# Altium PCB PCB1.PcbDoc
Units mil, origin at the board's own origin, x right, y up, seen from the top; angles counter-clockwise.
Board outline 8805 x 4000 mil, 4 copper layers (Top Layer, Power Layer, Ground Layer, Bottom Layer), stack 23.756 mil thick; 145 components, 78 nets, 477 pads, 0 vias.
Unrouted connection lines stored in the file: 348.
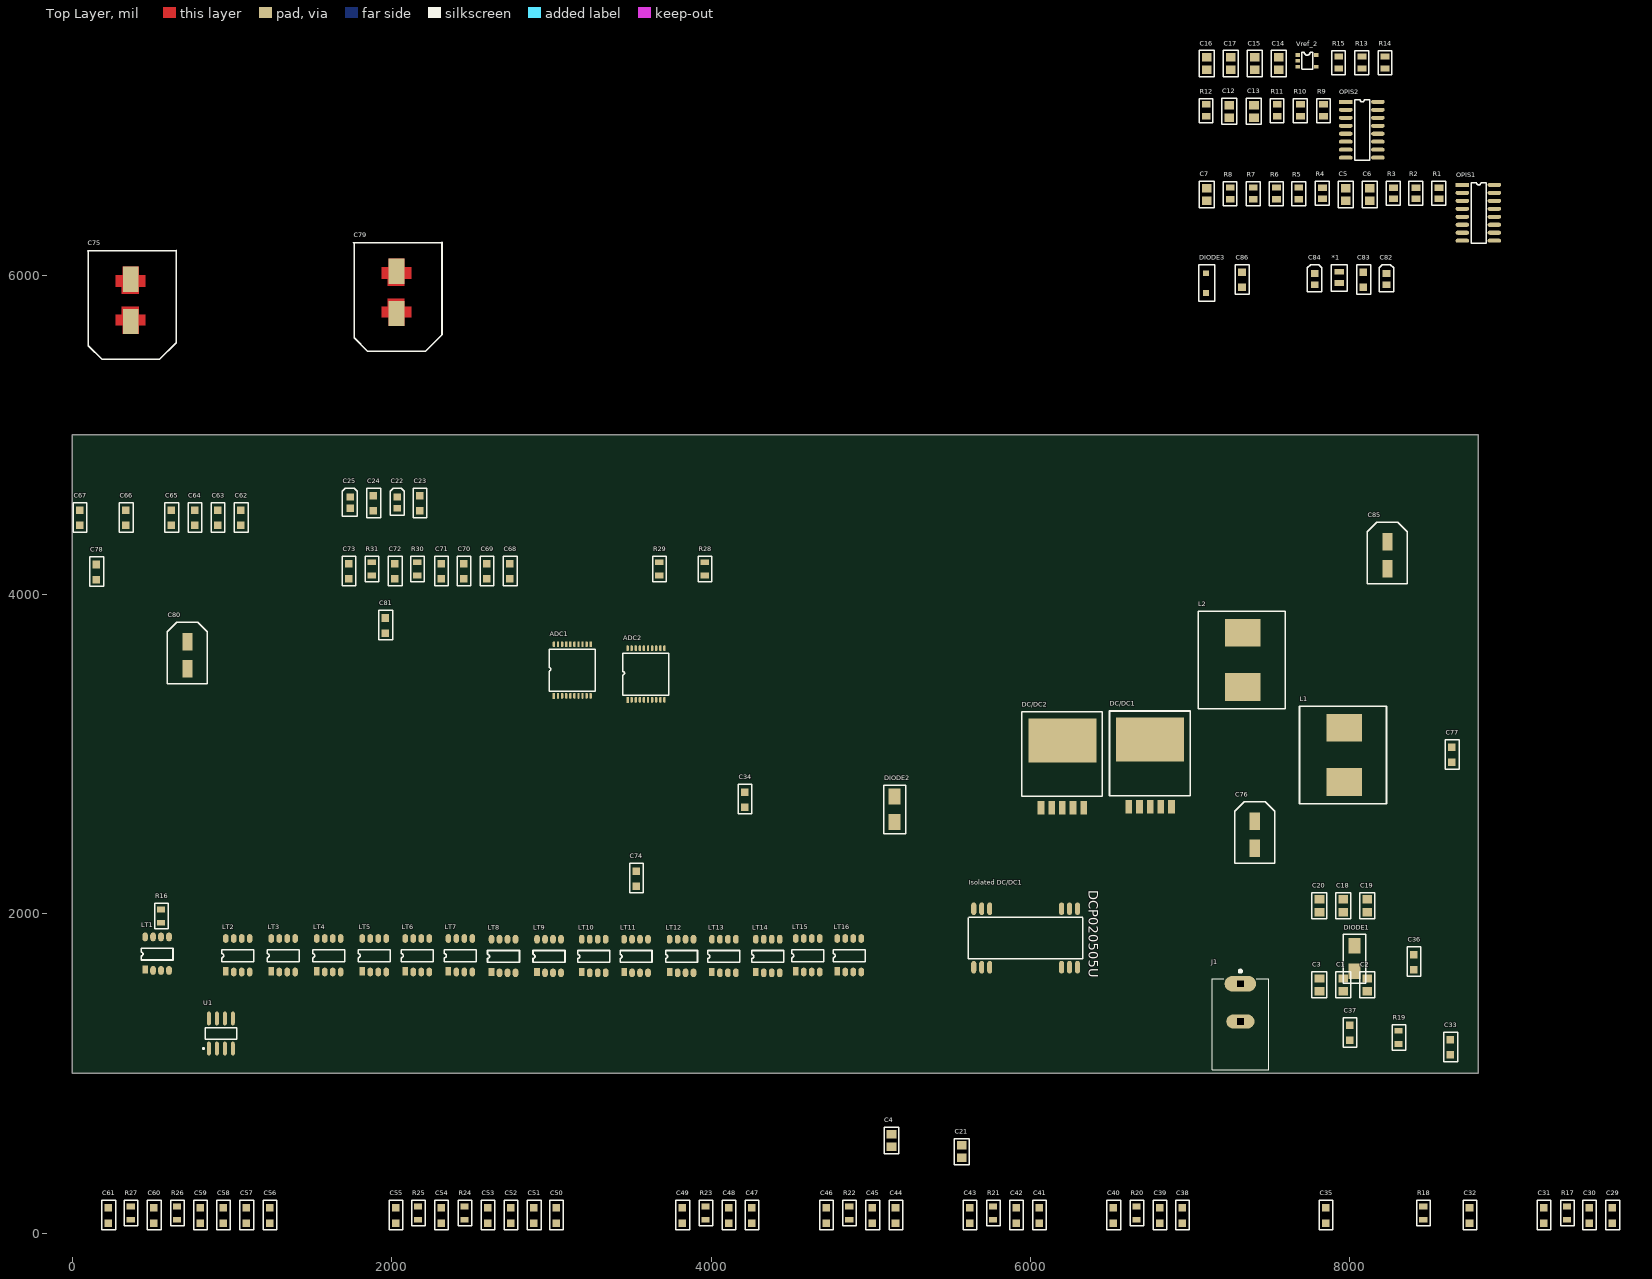
[diagram p0: Top Layer view]
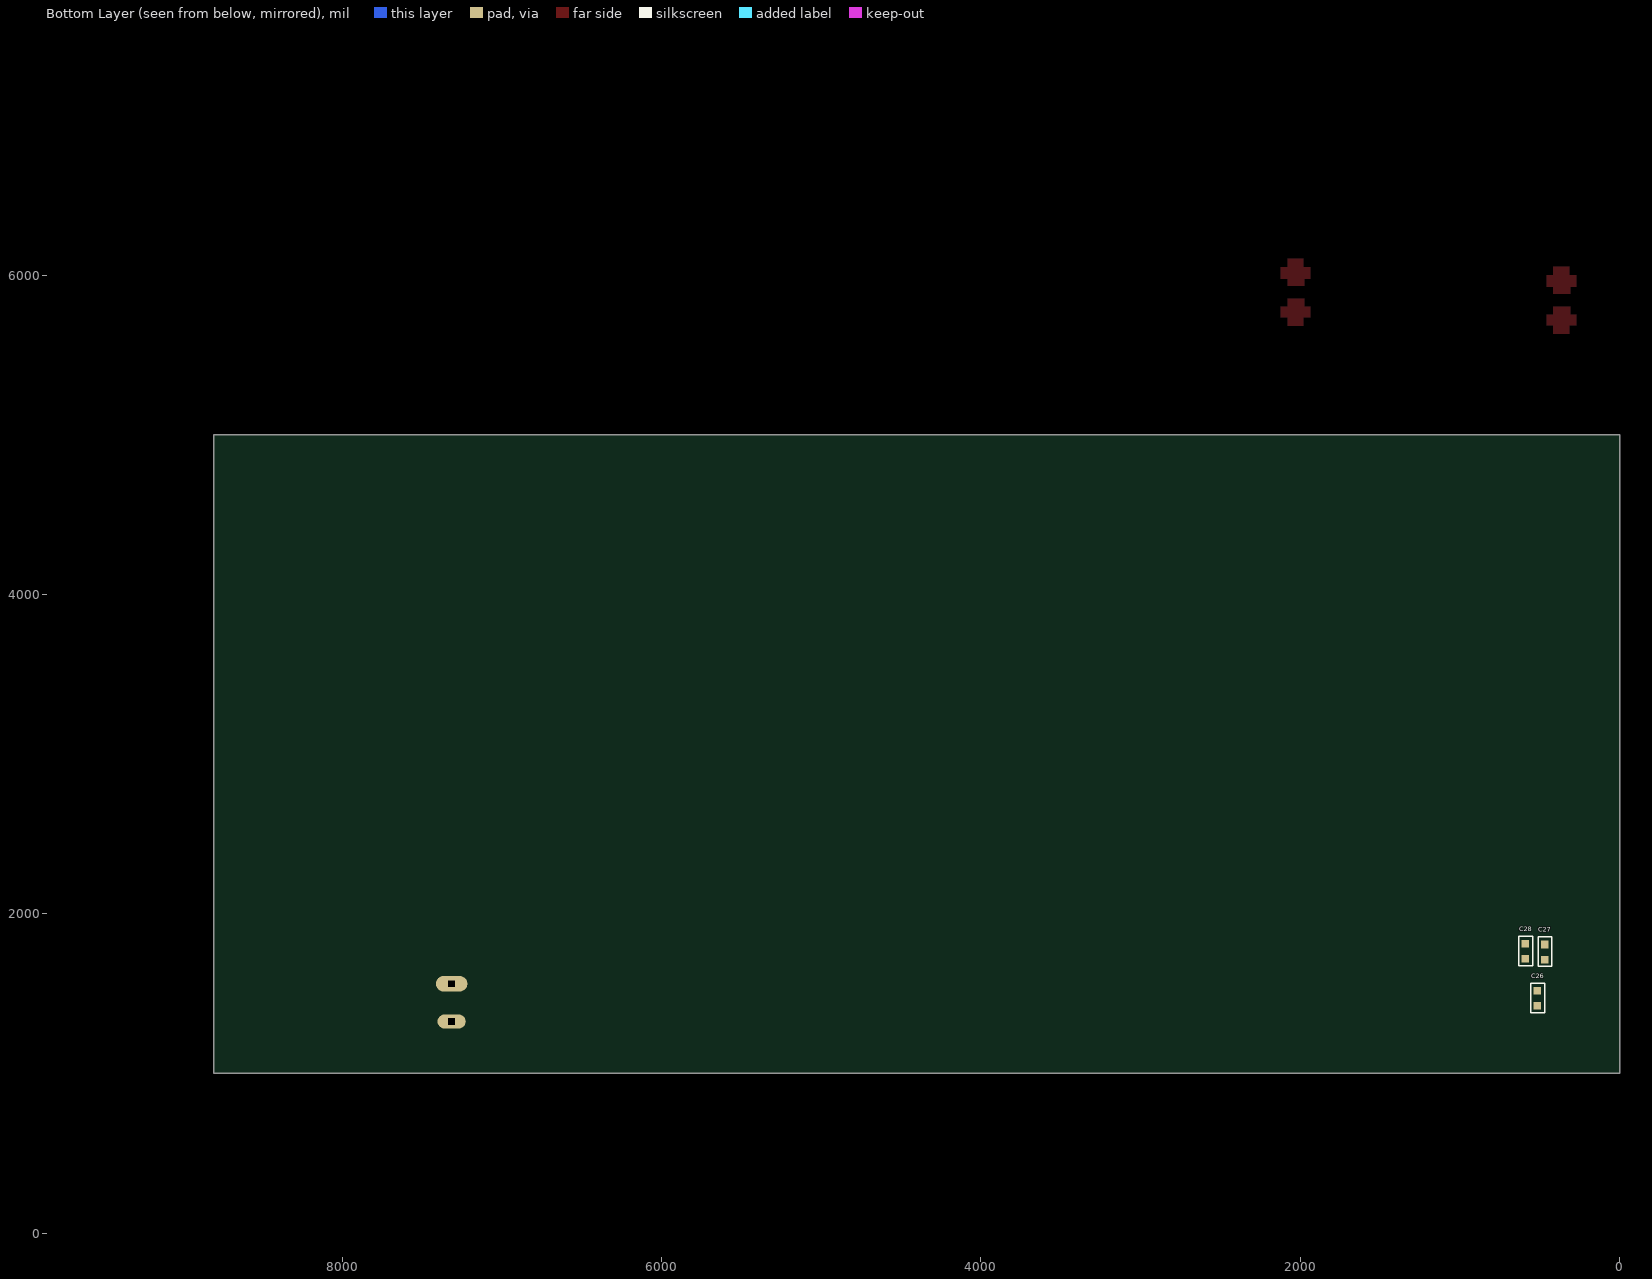
[diagram p1: Bottom Layer view, seen from below]

## Layer stack, top to bottom
Top Solder: solder mask 0.4, Solder Resist, Dk 3.5
Top Layer: signal copper 1.378
Dielectric 3: prepreg 2.8, PP-006, Dk 4.1
Power Layer: signal copper 1.4
Dielectric 1: dielectric 12.6, FR-4, Dk 4.8
Ground Layer: signal copper 1.4
Dielectric 4: prepreg 2.8, PP-006, Dk 4.1
Bottom Layer: signal copper 1.378
Bottom Solder: solder mask 0.4, Solder Resist, Dk 3.5

## Board outline
0,1000 8805,1000 8805,5000 0,5000
board region "Default Layer Stack Region": 5525,5000 8805,5000 8805,1000 5525,1000
board region "Default Layer Stack Region": 5525,1000 0,1000 0,5000 5525,5000

## Design rules (kind name [scope] priority, off if disabled: settings)
Clearance [All] p1: gap=10 ignorepadtopadclearanceinfootprint=FALSE except(0: Arc-Hole Track-Hole SMDPad-Hole THPad-Hole Via-Hole Fill-Hole Poly-Hole Region-Hole Text-Hole)
PolygonConnect [All] p1: connectstyle=Relief reliefconductorwidth=10 reliefentries=4 polygonreliefangle="90 Angle" airgapwidth=10
RoutingVias [All] p1: holewidth=28 width=50 viastyle="Through Hole" minholewidth=28 minwidth=50 maxholewidth=28 maxwidth=50
SolderMaskExpansion [All] p1: expansion=4 istentingtop=FALSE
Width [All] p1: maxlimit=10 minlimit=10 preferedwidth=10
30 further rules are at their usual default settings.

## Classes and differential pairs
component class V_Ref_1: C14 C15 C16 C17 R13 R14 R15 Vref_2
component class Opt_Isolator_2: C12 C13 OPIS2 R9 R10 R11 R12
component class Opt_Isolator_1: C5 C6 C7 OPIS1 R1 R2 R3 R4 R5 R6 R7 R8
component class "ISO DC/DC_1": *1 C82 C83 C84 C85 C86 DIODE3 "Isolated DC/DC1"
component class "Fuel Cell Schematic": J1
component class Designator: C22 C23 C24 C25 U1
component class DC/DC_5_1: C78 C79 C80 C81 DC/DC2 DIODE2 L2
component class DC/DC_3.3_1: C74 C75 C76 C77 DC/DC1 DIODE1 L1
component class ADC1: ADC2 C18 C19 C20 C21

## Components (designator, comment, footprint, x,y, rotation, side; value= is the part's Value field where it differs from the comment)
*1 "5.1ohm resistor" "5.1 ohm resistor" 7935,5985 r90 top
ADC1 "ADS8344N/1K" ADS8344 3015.87,3365 r90 top
ADC2 "ADS8344N/1K" ADS8344 3477.05,3340 r90 top
C1 "Value" Capacitor_Kemet_0805 7960,1555 r90 top
C2 "Value" Capacitor_Kemet_0805 8110,1555 r90 top
C3 "Value" Capacitor_Kemet_0805 7810,1555 r90 top
C4 "Value" Capacitor_Kemet_0805 5130,580 r90 top
C5 "Value" Capacitor_Kemet_0805 7975,6505 r90 top
C6 "Value" Capacitor_Kemet_0805 8125,6505 r90 top
C7 "Value" Capacitor_Kemet_0805 7105,6505 r90 top
C12 "Value" Capacitor_Kemet_0805 7245,7025 r90 top
C13 "Value" Capacitor_Kemet_0805 7400,7025 r90 top
C14 "Value" Capacitor_Kemet_0805 7555,7325 r90 top
C15 "Value" Capacitor_Kemet_0805 7405,7325 r90 top
C16 "Value" Capacitor_Kemet_0805 7105,7325 r90 top
C17 "Value" Capacitor_Kemet_0805 7255,7325 r90 top
C18 "Value" Capacitor_Kemet_0805 7960,2050 r90 top
C19 "Value" Capacitor_Kemet_0805 8110,2050 r90 top
C20 "Value" Capacitor_Kemet_0805 7810,2050 r90 top
C21 "Value" Capacitor_Kemet_0805 5570,510 r90 top
C22 "10 uF (6.3 V)" "10 uF cap" 2035,4575 r90 top
C23 ".1 uF (50 V)" ".1uF capacitor" 2175,4570 r90 top
C24 ".1 uF (50 V)" ".1uF capacitor" 1885,4570 r90 top
C25 "1uf (10V)" "1 uF cap" 1740,4575 r90 top
C26 ".1 uF (50 V)" ".1uF capacitor" 515,1470 r90 bottom
C27 ".1 uF (50 V)" ".1uF capacitor" 470,1760 r90 bottom
C28 ".1 uF (50 V)" ".1uF capacitor" 590,1765 r90 bottom
C29 ".1 uF (50 V)" ".1uF capacitor" 9645,110 r90 top
C30 ".1 uF (50 V)" ".1uF capacitor" 9500,110 r90 top
C31 ".1 uF (50 V)" ".1uF capacitor" 9215,110 r90 top
C32 ".1 uF (50 V)" ".1uF capacitor" 8750,110 r90 top
C33 ".1 uF (50 V)" ".1uF capacitor" 8630,1162.76 r90 top
C34 ".1 uF (50 V)" ".1uF capacitor" 4210,2715 r90 top
C35 ".1 uF (50 V)" ".1uF capacitor" 7850,110 r90 top
C36 ".1 uF (50 V)" ".1uF capacitor" 8400,1697.24 r90 top
C37 ".1 uF (50 V)" ".1uF capacitor" 8000,1255 r90 top
C38 ".1 uF (50 V)" ".1uF capacitor" 6950,110 r90 top
C39 ".1 uF (50 V)" ".1uF capacitor" 6810,110 r90 top
C40 ".1 uF (50 V)" ".1uF capacitor" 6520,110 r90 top
C41 ".1 uF (50 V)" ".1uF capacitor" 6055,110 r90 top
C42 ".1 uF (50 V)" ".1uF capacitor" 5910,110 r90 top
C43 ".1 uF (50 V)" ".1uF capacitor" 5620,110 r90 top
C44 ".1 uF (50 V)" ".1uF capacitor" 5155,110 r90 top
C45 ".1 uF (50 V)" ".1uF capacitor" 5010,110 r90 top
C46 ".1 uF (50 V)" ".1uF capacitor" 4720,110 r90 top
C47 ".1 uF (50 V)" ".1uF capacitor" 4255,110 r90 top
C48 ".1 uF (50 V)" ".1uF capacitor" 4110,110 r90 top
C49 ".1 uF (50 V)" ".1uF capacitor" 3820,110 r90 top
C50 ".1 uF (50 V)" ".1uF capacitor" 3030,110 r90 top
C51 ".1 uF (50 V)" ".1uF capacitor" 2890,110 r90 top
C52 ".1 uF (50 V)" ".1uF capacitor" 2745,110 r90 top
C53 ".1 uF (50 V)" ".1uF capacitor" 2600,110 r90 top
C54 ".1 uF (50 V)" ".1uF capacitor" 2310,110 r90 top
C55 ".1 uF (50 V)" ".1uF capacitor" 2025,110 r90 top
C56 ".1 uF (50 V)" ".1uF capacitor" 1235,110 r90 top
C57 ".1 uF (50 V)" ".1uF capacitor" 1090,110 r90 top
C58 ".1 uF (50 V)" ".1uF capacitor" 945,110 r90 top
C59 ".1 uF (50 V)" ".1uF capacitor" 800,110 r90 top
C60 ".1 uF (50 V)" ".1uF capacitor" 510,110 r90 top
C61 ".1 uF (50 V)" ".1uF capacitor" 225,110 r90 top
C62 ".1 uF (50 V)" ".1uF capacitor" 1055,4480 r90 top
C63 ".1 uF (50 V)" ".1uF capacitor" 910,4480 r90 top
C64 ".1 uF (50 V)" ".1uF capacitor" 765,4480 r90 top
C65 ".1 uF (50 V)" ".1uF capacitor" 620,4480 r90 top
C66 ".1 uF (50 V)" ".1uF capacitor" 335,4480 r90 top
C67 ".1 uF (50 V)" ".1uF capacitor" 45,4480 r90 top
C68 ".1 uF (50 V)" ".1uF capacitor" 2740,4145 r90 top
C69 ".1 uF (50 V)" ".1uF capacitor" 2595,4145 r90 top
C70 ".1 uF (50 V)" ".1uF capacitor" 2450,4145 r90 top
C71 ".1 uF (50 V)" ".1uF capacitor" 2310,4145 r90 top
C72 ".1 uF (50 V)" ".1uF capacitor" 2020,4145 r90 top
C73 ".1 uF (50 V)" ".1uF capacitor" 1730,4145 r90 top
C74 ".1 uF (50 V)" ".1uF capacitor" 3530,2220 r90 top
C75 "330 uF (35 V)" "330uf cap" 365,5841.89 r90 top
C76 "220 uF (6.3 V)" "220 uf cap" 7405,2495 r90 top
C77 ".1 uF (50 V)" ".1uF capacitor" 8640,2995 r90 top
C78 ".1 uF (50 V)" ".1uF capacitor" 150,4140 r90 top
C79 "330 uF (35 V)" "330uf cap" 2030,5891.89 r90 top
C80 "220 uF (6.3 V)" "220 uf cap" 720,3619.65 r90 top
C81 ".1 uF (50 V)" ".1uF capacitor" 1960,3805 r90 top
C82 "10 uF (6.3 V)" "10 uF cap" 8230,5975 r90 top
C83 ".1 uF (50 V)" ".1uF capacitor" 8085,5970 r90 top
C84 "10 uF (6.3 V)" "10 uF cap" 7780,5975 r90 top
C85 "220 uF (6.3 V)" "220 uf cap" 8235,4245.35 r90 top
C86 ".1 uF (50 V)" ".1uF capacitor" 7325,5970 r90 top
DC/DC1 "Value" LM2595s-3.3 6750,2669.92 r90 top
DC/DC2 "LM2595s-5.0" LM2595s-5.0 6200,2664.92 r90 top
DIODE1 "B340AE-13" B340AE-13 8030,1720 r90 top
DIODE2 "B340AE-13" B340AE-13 5150,2655 r90 top
DIODE3 "Value" "MMSZ5231B-7-F Zener diode" 7100,5950 r90 top
"Isolated DC/DC1" "DCP020505U/1K" "DCP020505U - duplicate" 6295,2031.14 r270 top
J1 "PJ-037A" CUI_PJ-037A 7315,1561.22 r270 top
L1 "100 uH" "100uH inductor" 7965,2825 r90 top
L2 "100 uH" "100uH inductor" 7330,3420 r90 top
LT1 "LT1990" LT1990ACS8 455,1650 r90 top
LT2 "LT1990" LT1990ACS8 960,1640 r90 top
LT3 "LT1990" LT1990ACS8 1245,1640 r90 top
LT4 "LT1990" LT1990ACS8 1530,1640 r90 top
LT5 "LT1990" LT1990ACS8 1815,1640 r90 top
LT6 "LT1990" LT1990ACS8 2085,1640 r90 top
LT7 "LT1990" LT1990ACS8 2355,1640 r90 top
LT8 "LT1990" LT1990ACS8 2625,1635 r90 top
LT9 "LT1990" LT1990ACS8 2910,1635 r90 top
LT10 "LT1990" LT1990ACS8 3190,1635 r90 top
LT11 "LT1990" LT1990ACS8 3455,1635 r90 top
LT12 "LT1990" LT1990ACS8 3740,1635 r90 top
LT13 "LT1990" LT1990ACS8 4005,1635 r90 top
LT14 "LT1990" LT1990ACS8 4280,1635 r90 top
LT15 "LT1990" LT1990ACS8 4530,1640 r90 top
LT16 "LT1990" LT1990ACS8 4790,1640 r90 top
OPIS1 "Value" Opto_Isolator_ACSL6400_50TE 8705,6565 r0 top
OPIS2 "Value" Opto_Isolator_ACSL6400_50TE 7975,7085 r0 top
R1 "Value" LowR_Yageo 8555,6535 r90 top
R2 "Value" LowR_Yageo 8410,6535 r90 top
R3 "Value" LowR_Yageo 8270,6535 r90 top
R4 "Value" LowR_Yageo 7825,6535 r90 top
R5 "Value" Resistor_YAGEO_0805 7680,6510 r90 top
R6 "Value" Resistor_YAGEO_0805 7540,6510 r90 top
R7 "Value" Resistor_YAGEO_0805 7395,6510 r90 top
R8 "Value" Resistor_YAGEO_0805 7250,6510 r90 top
R9 "Value" Resistor_YAGEO_0805 7835,7030 r90 top
R10 "Value" Resistor_YAGEO_0805 7690,7030 r90 top
R11 "Value" Resistor_YAGEO_0805 7545,7030 r90 top
R12 "Value" Resistor_YAGEO_0805 7100,7030 r90 top
R13 "Value" Resistor_YAGEO_0805 8075,7330 r90 top
R14 "Value" Resistor_YAGEO_0805 8220,7330 r90 top
R15 "Value" Resistor_YAGEO_0805 7930,7330 r90 top
R16 "1kohm resistor" "1kohm resistor" 555,1985 r90 top
R17 "1kohm resistor" "1kohm resistor" 9360,125 r90 top
R18 "1kohm resistor" "1kohm resistor" 8460,125 r90 top
R19 "1kohm resistor" "1kohm resistor" 8305,1225 r90 top
R20 "1kohm resistor" "1kohm resistor" 6665,125 r90 top
R21 "1kohm resistor" "1kohm resistor" 5765,125 r90 top
R22 "1kohm resistor" "1kohm resistor" 4865,125 r90 top
R23 "1kohm resistor" "1kohm resistor" 3965,125 r90 top
R24 "1kohm resistor" "1kohm resistor" 2455,125 r90 top
R25 "1kohm resistor" "1kohm resistor" 2165,125 r90 top
R26 "1kohm resistor" "1kohm resistor" 655,125 r90 top
R27 "1kohm resistor" "1kohm resistor" 365,125 r90 top
R28 "1kohm resistor" "1kohm resistor" 3960,4160 r90 top
R29 "1kohm resistor" "1kohm resistor" 3675,4160 r90 top
R30 "1kohm resistor" "1kohm resistor" 2160,4160 r90 top
R31 "1kohm resistor" "1kohm resistor" 1875,4160 r90 top
U1 "REF191GSZ-REEL" ADI-R-8_N 930,1250 r90 top
Vref_2 "Value" VRef 7680,7380 r0 top

## Footprints (in the part's own frame and the unit in brackets; to place one, negate y for a bottom-side part, rotate by r counter-clockwise, add the part's x,y. Pads: shape width x height; smd on the part's side, far side on the other; paste and mask are expansions set on the pad)
"1 uF cap" [mm]
  rect 1.15x1.2 smd: 1(0.889,0) 2(-0.889,0)
  silkscreen extent -2.16,-1.14 2.29,1.27, body extent -1.12,-0.72 1.12,0.72, height 1.24
"1kohm resistor" [mm]
  rect 0.9x1.3 smd: 1(-1.05,0) 2(1.05,0)
  silkscreen extent -2.03,-1.14 2.03,1.02, body extent -1.1,-0.67 1.1,0.67, height 0.66
"5.1 ohm resistor" [mm]
  rect 0.9x1.5 smd: 1(-0.889,0) 2(0.889,0)
  silkscreen extent -2.16,-1.27 2.03,1.27, body extent -1.1,-0.67 1.1,0.67, height 0.66
"10 uF cap" [mm]
  rect 1.05x1.2 smd: 1(0.889,0) 2(-0.889,0)
  silkscreen extent -2.03,-1.14 2.29,1.14, body extent -1.12,-0.72 1.12,0.72, height 1.24
"100uH inductor" [mm]
  rect 4.4x5.7 smd: 1(0,0) 2(8.636,0)
  silkscreen extent -3.43,-6.73 12.06,7.11, body extent -1.83,-6.27 10.47,6.02, height 8.05
"220 uf cap" [mm]
  rect 2.8x1.6 smd: 1(2.15,0) 2(-2.15,0)
  silkscreen extent -4.57,-3.18 5.25,3.18, body extent -3.25,-2.76 3.25,2.76, height 6.15
"330uf cap" [mil]
  rect 157x98 smd paste+0 mask+0: 1(-131.89,0) 2(131.89,0)
  Top Layer region: -157.39,49 -210.39,49 -210.39,-49 -157.39,-49 -157.39,-92 -90,-92 -90,-49 -40,-49 -40,55 -90,55 -90,92 -157.39,92
  Top Layer region: 85,55 40,55 40,-49 85,-49 85,-92 157.39,-92 157.39,-49 210.39,-49 210.39,49 157.39,49 157.39,92 85,92
  silkscreen extent -370,-285 312,270, body extent -191,-158 191,168, height 414
".1uF capacitor" [mm]
  rect 1.2x1.2 smd: 1(-1.2,0) 2(1.2,0)
  silkscreen extent -2.29,-1.14 2.41,1.03, body extent -1,-0.63 1,0.63, height 1.35
ADI-R-8_N [mm] "SOIC, 8-Leads, Body 4.9x3.9mm, Pitch 1.27mm, IPC Medium Density"
  oval 2.2x0.6 smd: 1(-2.4,1.905) 2(-2.4,0.635) 3(-2.4,-0.635) 4(-2.4,-1.905) 5(2.4,-1.905) 6(2.4,-0.635) 7(2.4,0.635) 8(2.4,1.905)
  silkscreen extent -2.52,-2.5 0.9,2.88, body extent -3.1,-2.5 3.1,2.5, height 1.76
ADS8344 [mm]
  rect 0.95x0.38 smd: 1(0,0)
  oval 0.95x0.38 smd: 2(0,-0.65) 3(0,-1.3) 4(0,-1.95) 5(0,-2.6) 6(0,-3.25) 7(0,-3.9) 8(0,-4.55) 9(0,-5.2) 10(0,-5.85) 11(8.2,-5.85) 12(8.2,-5.2) 13(8.2,-4.55) 14(8.2,-3.9) 15(8.2,-3.25) 16(8.2,-2.6) 17(8.2,-1.95) 18(8.2,-1.3) 19(8.2,-0.65) 20(8.2,0)
  silkscreen extent 0.75,-6.55 7.42,0.77, body extent -0.03,-6.67 8.18,0.82, height 2.01
B340AE-13 [mm]
  rect 2.5x1.9 smd: A(-2.032,0) K(2,0)
  silkscreen extent -3.94,-1.78 3.81,1.78, body extent -2.79,-1.46 2.79,1.46, height 2.44
Capacitor_Kemet_0805 [mm]
  rect 1.35x1.55 smd: 1(-1,0) 2(1,0)
  silkscreen extent -2.08,-1.17 2.08,1.19, body extent -1.15,-0.72 1.15,0.72, height 1.4
CUI_PJ-037A [mm]
  oval 2.5x5 hole 1 square: 1(0,0)
  oval 2.25x4.5 hole 1 square: 2(6,0)
  silkscreen extent -2.2,-4.5 13.7,4.5, body extent -0.91,-4.63 13.59,4.37, height 10.51
"DCP020505U - duplicate" [mm]
  oval 2x0.8 smd: 1(0,0) 2(0,-1.27) 3(0,-2.54) 4(0,-13.97) 5(0,-15.24) 6(0,-16.51) 7(9.3,0) 8(9.3,-1.27) 9(9.3,-2.54) 10(9.3,-13.97) 11(9.3,-15.24) 12(9.3,-16.51)
  silkscreen extent 1.33,-17.35 7.97,0.82, body extent -0.63,-17.3 10.02,0.79, height 1.7
LM2595s-3.3 [mm]
  rect 2.16x1.07 smd: 1(0,3.4) 2(0,1.7) 3(0,0) 4(0,-1.7) 5(0,-3.4)
  rect 7x10.8 smd: 6(10.67,0)
  silkscreen extent 1.78,-6.35 15.24,6.48, body extent 0,-5.21 12.13,5.21, height 4.8
LM2595s-5.0 [mm]
  rect 2.16x1.07 smd: 1(0,3.4) 2(0,1.7) 3(0,0) 4(0,-1.7) 5(0,-3.4)
  rect 7x10.8 smd: 6(10.67,0)
  silkscreen extent 1.78,-6.35 15.24,6.48, body extent 0,-5.21 12.13,5.21, height 4.8
LowR_Yageo [mm]
  rect 1x1.4 smd: 1(-1.45,-0.1) 2(0.3,-0.1)
  silkscreen extent -2.51,-1.17 1.3,1.02, body extent -1.58,-0.72 0.43,0.48, height 0.71
LT1990ACS8 [mil]
  rect 51.18x35 smd: 1(0,0)
  oval 55.12x35 smd: 2(-5,-50) 3(-5,-100) 4(-5,-150) 5(205,-150) 6(205,-100) 7(205,-50) 8(205,0)
  silkscreen extent 60,-175 135,25, body extent -20,-174 224,24, height 69
"MMSZ5231B-7-F Zener diode" [mm]
  rect 0.9x0.95 smd: A(-1.575,0) K(1.575,0)
  silkscreen extent -2.92,-1.4 2.92,1.13, body extent -1.92,-0.67 1.92,0.67, height 0.81
Opto_Isolator_ACSL6400_50TE [mm]
  rect 2.16x0.64 smd: 1(0,0)
  oval 2.16x0.64 smd: 2(0,-1.27) 3(0,-2.54) 4(0,-3.81) 5(0,-5.08) 6(0,-6.35) 7(0,-7.62) 8(0,-8.89) 9(5.11,-8.89) 10(5.11,-7.62) 11(5.11,-6.35) 12(5.11,-5.08) 13(5.11,-3.81) 14(5.11,-2.54) 15(5.11,-1.27) 16(5.11,0)
  silkscreen extent 1.42,-9.33 3.8,0.31, body extent -0.52,-9.45 5.67,0.55, height 1.53
Resistor_YAGEO_0805 [mil]
  rect 39.37x55.12 smd: 1(-36,-1) 2(39,-1)
  silkscreen extent -75,-43 75,43, body extent -40,-27 43,26, height 24
VRef [mil]
  rect 27.56x23.62 smd: 1(-5,-1) 2(-5,-38) 3(-5,-76) 4(110,-76) 5(110,-1)
  silkscreen extent 18,-92 87,16, body extent -6,-97 112,21, height 57

## Part data
ADC1 ADC2: "IC ADC 16BIT SAR 20SSOP", Case/Package=SSOP, Manufacturer="Texas Instruments", Max Operating Temperature=85°C, Max Power Dissipation=10mW, Max Supply Voltage=5.25V, Min Operating Temperature=-40°C, Min Supply Voltage=2.7V, Nominal Supply Current=1.5mA, Operating Supply Voltage=5V, Package Quantity=1000, Power Consumption=3.6mW, Power Dissipation=7.5mW, Supplier Part Number 1=296-41197-1-ND, Category="Analog to Digital Converters (ADCs)", ComponentLink1Description=https://datasheet.ciiva.com/4031/2422049s9164356n7713-4031078.pdf?src-supplier=Arrow+Electronics, ComponentLink1URL=https://datasheet.ciiva.com/4031/2422049s9164356n7713-4031078.pdf?src-supplier=Arrow+Electronics, ComponentLink2Description=https://datasheet.ciiva.com/1308/ads8344-1308384.pdf?src-supplier=Digi-Key, ComponentLink2URL=https://datasheet.ciiva.com/1308/ads8344-1308384.pdf?src-supplier=Digi-Key, Contact Plating=Gold, Conversion Rate=100KS/s, Differential Nonlinearity=2LSB, Integral Nonlinearity (INL)=6LSB, Interface=Serial, Lead Free="Lead Free", Manufacturer Part Number=ADS8344N/1K, Max Supply Voltage (DC)=5.25V, Min Supply Voltage (DC)=2.7V, Number of A/D Converters=1, Number of Bits=16, Number of Converters=1, Number of Inputs=8, Number of Pins=20, Packaging="Tape and Reel", Polarity=Unipolar, Pricing 1="1=18.10000, 10=16.63400, 25=15.94480, 100=14.04870, 250=13.35924, 500=13.00960 (USD)", REACH SVHC="No SVHC", Resolution=16b, RoHS=Yes, RoHS Compliant=Yes, Sampling Rate=100KS/s, Series=-, Spurious-free dynamic range (SFDR)=92dB, Stock 1=1147, Supplier 1=Digi-Key, Supply Current=1.5mA, Supply Type=Single
C1 C2 C7 C16 C17 C18 C19: library part C0805C475J4RACAUTO, "CAP CER 4.7UF 16V X7R 0805", Capacitance=4.7uF, Case/Package=0805, Manufacturer=KEMET, Max Operating Temperature=125°C, Min Operating Temperature=-55°C, Ratings=AEC-Q200, Supplier Part Number 1=399-15716-1-ND, Tolerance=5%, Voltage Rating=16V, Category="Ceramic Capacitors", ComponentLink1Description=http://www.farnell.com/datasheets/2741387.pdf?src-supplier=Farnell, ComponentLink1URL=http://www.farnell.com/datasheets/2741387.pdf?src-supplier=Farnell, ComponentLink2Description=https://api.kemet.com/component-edge/download/datasheet/C0805C475J4RACAUTO.pdf?src-supplier=Digi-Key, ComponentLink2URL=https://api.kemet.com/component-edge/download/datasheet/C0805C475J4RACAUTO.pdf?src-supplier=Digi-Key, ComponentLink3Description=http://www.farnell.com/datasheets/2741387.pdf?src-supplier=Newark, ComponentLink3URL=http://www.farnell.com/datasheets/2741387.pdf?src-supplier=Newark, Manufacturer Part Number=C0805C475J4RACAUTO, Mount="Surface Mount", Packaging="Tape and Reel", Pricing 1="1=0.56000, 10=0.39300, 50=0.29680, 100=0.25850, 500=0.19150, 1000=0.16277 (USD)", RoHS=Yes, RoHS Compliant=Yes, Stock 1=16673, Supplier 1=Digi-Key
C3 C4 C14 C15 C20 C21: library part C0805C104J4RACTU, "Cap Ceramic 0.1uF 16V X7R 5% SMD 0805 125°C Plastic T/R", Capacitance=100nF, Case Code (Imperial)=0805, Case Code (Metric)=2012, Dielectric=X7R, Dielectric Material=Ceramic, Manufacturer=KEMET, Max Operating Temperature=125°C, Min Operating Temperature=-55°C, Package Quantity=4000, Supplier Part Number 1=399-C0805C104J4RAC7800CT-ND, Voltage Rating=16V, Case/Package=0805, Category="Ceramic Capacitors", ComponentLink1Description=http://www.farnell.com/datasheets/2746326.pdf?src-supplier=Farnell, ComponentLink1URL=http://www.farnell.com/datasheets/2746326.pdf?src-supplier=Farnell, ComponentLink2Description=http://www.farnell.com/datasheets/2323359.pdf?src-supplier=Farnell, ComponentLink2URL=http://www.farnell.com/datasheets/2323359.pdf?src-supplier=Farnell, ComponentLink3Description=http://www.mouser.com/ds/2/212/KEM_C1002_X7R_SMD-1102033.pdf?src-supplier=Mouser, ComponentLink3URL=http://www.mouser.com/ds/2/212/KEM_C1002_X7R_SMD-1102033.pdf?src-supplier=Mouser, ComponentLink4Description=http://components.arrow.com/part/dataview/3452184S4481915N7429?src-supplier=Arrow+Electronics, ComponentLink4URL=http://components.arrow.com/part/dataview/3452184S4481915N7429?src-supplier=Arrow+Electronics, ComponentLink5Description=https://api.kemet.com/component-edge/download/datasheet/C0805C104J4RACTU.pdf?src-supplier=Digi-Key, ComponentLink5URL=https://api.kemet.com/component-edge/download/datasheet/C0805C104J4RACTU.pdf?src-supplier=Digi-Key, ComponentLink6Description=http://www.farnell.com/datasheets/2330568.pdf?src-supplier=Newark, ComponentLink6URL=http://www.farnell.com/datasheets/2330568.pdf?src-supplier=Newark, ComponentLink7Description=http://www.farnell.com/datasheets/2746326.pdf?src-supplier=Newark, ComponentLink7URL=http://www.farnell.com/datasheets/2746326.pdf?src-supplier=Newark, Depth=1.25mm, Dissipation Factor=5%, Height=0.9mm, Lead Pitch=0.75mm, Length=2mm, Manufacturer Part Number=C0805C104J4RACTU, Mount="Surface Mount", Packaging="Tape and Reel", Pricing 1="1=0.53000, 10=0.37300, 50=0.28180, 100=0.24540, 500=0.18180, 1000=0.15453 (USD)", RoHS=Yes, RoHS Compliant=Yes, Series=-, Stock 1=21669, Supplier 1=Digi-Key, Termination=SMD/SMT, Thickness=0.035inch, Voltage Rating (DC)=16V, Width=1.2mm
C5 C6 C12 C13: library part C0805C104K6RACTU, "Cap Ceramic 0.1uF 35V X7R 10% SMD 0805 125°C Paper T/R", Capacitance=100nF, Case/Package=0805, Dielectric=X7R, Dielectric Material=Ceramic, Manufacturer=KEMET, Max Operating Temperature=125°C, Min Operating Temperature=-55°C, Supplier Part Number 1=399-17618-1-ND, Tolerance=10%, Voltage Rating (DC)=35V, Category="Ceramic Capacitors", ComponentLink1Description=http://www.kemet.com/kemet/web/homepage/kechome.nsf/weben/C4DA2DA1D1C9D3C3CA2570A50016092D/$file/KEM_C1002_X7R_SMD.pdf?src-supplier=Avnet, ComponentLink1URL=http://www.kemet.com/kemet/web/homepage/kechome.nsf/weben/C4DA2DA1D1C9D3C3CA2570A50016092D/$file/KEM_C1002_X7R_SMD.pdf?src-supplier=Avnet, ComponentLink2Description=https://api.kemet.com/component-edge/download/datasheet/C0805C104K6RAC7800.pdf?src-supplier=Digi-Key, ComponentLink2URL=https://api.kemet.com/component-edge/download/datasheet/C0805C104K6RAC7800.pdf?src-supplier=Digi-Key, Construction=Flat, Depth=1.25mm, Height=0.9mm, Length=2mm, Manufacturer Part Number=C0805C104K6RACTU, Mount="Surface Mount", Packaging="Tape and Reel", Pricing 1="1=0.44000, 10=0.30300, 50=0.21200, 100=0.18180, 500=0.13636, 1000=0.11514 (USD)", Radiation Hardening=No, RoHS=Yes, RoHS Compliant=Yes, Stock 1=14662, Supplier 1=Digi-Key
C22 C82 C84: library part "10 uF cap"
C23 C24 C26 C27 C28 C29 C30 C31 C32 C33 C34 C35 C36 C37 C38 C39 C40 C41 C42 C43 C44 C45 C46 C47 C48 C49 C50 C51 C52 C53 C54 C55 C56 C57 C58 C59 C60 C61 C62 C63 C64 C65 C66 C67 C68 C69 C70 C71 C72 C73 C74 C77 C78 C81 C83 C86: library part ".1 uF cap"
C25: library part "1uf cap"
C75 C79: library part "330 uF cap"
C76 C80 C85: library part "220 uF capacitor"
DC/DC1: library part LM2595SX-3.3/NOPB, "SIMPLE SWITCHE Power Converter 150 KHz 1A Step-Down Voltage egulator 5-DDPAK/TO-263", Case/Package=TO-263, Frequency=150kHz, Manufacturer="Texas Instruments", Manufacturer Part Number=LM2595S-5.0/NOPB, Max Input Voltage=40V, Max Operating Temperature=125°C, Max Output Current=1A, Max Output Voltage=5V, Min Input Voltage=4.5V, Min Operating Temperature=-40°C, Package Quantity=45, Quiescent Current=5mA, Switching Frequency=173kHz, Category="Voltage Regulators - Switching", ComponentLink1Description=https://datasheet.ciiva.com/14150/eanatsemico-schaltr-lm2595-en-14150687.pdf?src-supplier=Distrelec, ComponentLink1URL=https://datasheet.ciiva.com/14150/eanatsemico-schaltr-lm2595-en-14150687.pdf?src-supplier=Distrelec, ComponentLink2Description=https://datasheet.ciiva.com/15112/getdatasheetpartid-89913-15112836.pdf?src-supplier=Verical, ComponentLink2URL=https://datasheet.ciiva.com/15112/getdatasheetpartid-89913-15112836.pdf?src-supplier=Verical, ComponentLink3Description=https://datasheet.ciiva.com/25775/1771567-25775403.pdf?src-supplier=Farnell, ComponentLink3URL=https://datasheet.ciiva.com/25775/1771567-25775403.pdf?src-supplier=Farnell, ComponentLink4Description=https://datasheet.ciiva.com/22746/1771567-22746709.pdf?src-supplier=Element14, ComponentLink4URL=https://datasheet.ciiva.com/22746/1771567-22746709.pdf?src-supplier=Element14, ComponentLink5Description=https://datasheet.ciiva.com/3219/lm2595-3219977.pdf?src-supplier=Avnet, ComponentLink5URL=https://datasheet.ciiva.com/3219/lm2595-3219977.pdf?src-supplier=Avnet, Efficiency=82%, Height=4.57mm, Lead Free="Contains Lead", Length=10.16mm, Max Supply Voltage=40V, Min Supply Voltage=4.5V, Mount="Surface Mount", Nominal Output Voltage=5V, Number of Outputs=1, Number of Pins=5, Output Current=1A, Output Type=Fixed, Output Voltage=5V, Packaging=Rail/Tube, Radiation Hardening=No, REACH SVHC="No SVHC", RoHS=Yes, RoHS Compliant=Yes, Supplier 1=Digi-Key, Termination=SMD/SMT, Weight=0.25lb, Width=8.64mm
DC/DC2: library part LM2595S-5.0/NOPB, "SIMPLE SWITCHE Power Converter 150 KHz 1A Step-Down Voltage egulator 5-DDPAK/TO-263", Case/Package=TO-263, Frequency=150kHz, Manufacturer="Texas Instruments", Max Input Voltage=40V, Max Operating Temperature=125°C, Max Output Current=1A, Max Output Voltage=5V, Min Input Voltage=4.5V, Min Operating Temperature=-40°C, Package Quantity=45, Quiescent Current=5mA, Supplier Part Number 1=LM2595S-5.0/NOPB-ND, Switching Frequency=173kHz, Category="Voltage Regulators - Switching", ComponentLink1Description=https://datasheet.ciiva.com/14150/eanatsemico-schaltr-lm2595-en-14150687.pdf?src-supplier=Distrelec, ComponentLink1URL=https://datasheet.ciiva.com/14150/eanatsemico-schaltr-lm2595-en-14150687.pdf?src-supplier=Distrelec, ComponentLink2Description=https://datasheet.ciiva.com/15112/getdatasheetpartid-89913-15112836.pdf?src-supplier=Verical, ComponentLink2URL=https://datasheet.ciiva.com/15112/getdatasheetpartid-89913-15112836.pdf?src-supplier=Verical, ComponentLink3Description=https://datasheet.ciiva.com/25775/1771567-25775403.pdf?src-supplier=Farnell, ComponentLink3URL=https://datasheet.ciiva.com/25775/1771567-25775403.pdf?src-supplier=Farnell, ComponentLink4Description=https://datasheet.ciiva.com/22746/1771567-22746709.pdf?src-supplier=Element14, ComponentLink4URL=https://datasheet.ciiva.com/22746/1771567-22746709.pdf?src-supplier=Element14, ComponentLink5Description=https://datasheet.ciiva.com/3219/lm2595-3219977.pdf?src-supplier=Avnet, ComponentLink5URL=https://datasheet.ciiva.com/3219/lm2595-3219977.pdf?src-supplier=Avnet, Efficiency=82%, Height=4.57mm, Lead Free="Contains Lead", Length=10.16mm, Manufacturer Part Number=LM2595S-5.0/NOPB, Max Supply Voltage=40V, Min Supply Voltage=4.5V, Mount="Surface Mount", Nominal Output Voltage=5V, Number of Outputs=1, Number of Pins=5, Output Current=1A, Output Type=Fixed, Output Voltage=5V, Packaging=Rail/Tube, Radiation Hardening=No, REACH SVHC="No SVHC", RoHS=Yes, RoHS Compliant=Yes, Supplier 1=Digi-Key, Termination=SMD/SMT, Weight=0.25lb, Width=8.64mm
DIODE1 DIODE2: "Schottky Diode, DO-201, 40V, 3.00A", Average Rectified Current=3A, Capacitance=190pF, Case/Package=DO-201AD, Forward Voltage=950mV, Manufacturer=STMicroelectronics, Max Forward Surge Current (Ifsm)=80A, Max Operating Temperature=150°C, Max Repetitive Reverse Voltage (Vrrm)=40V, Max Reverse Current=2mA, Min Operating Temperature=-65°C, Package Quantity=1, Supplier Part Number 1=511-1N5822, Category="Rectifier Diodes", ComponentLink1Description=https://datasheet.ciiva.com/1177/1689683-1177129.pdf?src-supplier=Element14, ComponentLink1URL=https://datasheet.ciiva.com/1177/1689683-1177129.pdf?src-supplier=Element14, ComponentLink2Description=https://datasheet.ciiva.com/26339/168275-da-01-en-schottky-barrier-rectif-axial-1n5822-26339005.pdf?src-supplier=Conrad, ComponentLink2URL=https://datasheet.ciiva.com/26339/168275-da-01-en-schottky-barrier-rectif-axial-1n5822-26339005.pdf?src-supplier=Conrad, ComponentLink3Description=https://datasheet.ciiva.com/16303/cd00001626-16303311.pdf?src-supplier=Future+Electronics, ComponentLink3URL=https://datasheet.ciiva.com/16303/cd00001626-16303311.pdf?src-supplier=Future+Electronics, ComponentLink4Description=https://datasheet.ciiva.com/916/cd00001626-916051.pdf?src-supplier=Digi-Key, ComponentLink4URL=https://datasheet.ciiva.com/916/cd00001626-916051.pdf?src-supplier=Digi-Key, ComponentLink5Description=https://datasheet.ciiva.com/916/cd00001626-916050.pdf?src-supplier=Digi-Key, ComponentLink5URL=https://datasheet.ciiva.com/916/cd00001626-916050.pdf?src-supplier=Digi-Key, Current Rating=3A, Element Configuration=Single, Forward Current=3A, Height=5.3mm, Lead Free="Lead Free", Length=9.5mm, Manufacturer Part Number=B340AE-13, Max Reverse Leakage Current=2mA, Max Reverse Voltage (DC)=40V, Max Surge Current=80A, Mount="Through Hole", Number of Pins=2, Output Current=3A, Packaging="Tape and Reel", Peak Non-Repetitive Surge Current=80A, Polarity=Standard, Pricing 1="1=0.47000, 10=0.38600, 50=0.38600, 100=0.26300, 600=0.19700, 1000=0.19700, 1200=0.14700, 2400=0.12700, 9600=0.11900, 10000=0.11900 (USD)", Radiation Hardening=No, REACH SVHC="No SVHC", RoHS=Yes, RoHS Compliant=Yes, Series=-, Stock 1=125419, Supplier 1=Mouser, Voltage Rating (DC)=40V, Weight=0.01lb, Width=5.3mm
DIODE3: library part MMSZ5231B-7-F, "Zener diode", Average Rectified Current=3A, Capacitance=190pF, Case/Package=DO-201AD, Forward Voltage=950mV, Manufacturer=STMicroelectronics, Max Forward Surge Current (Ifsm)=80A, Max Operating Temperature=150°C, Max Repetitive Reverse Voltage (Vrrm)=40V, Max Reverse Current=2mA, Min Operating Temperature=-65°C, Package Quantity=1, Supplier Part Number 1=511-1N5822, Category="Rectifier Diodes", ComponentLink1Description=https://datasheet.ciiva.com/1177/1689683-1177129.pdf?src-supplier=Element14, ComponentLink1URL=https://datasheet.ciiva.com/1177/1689683-1177129.pdf?src-supplier=Element14, ComponentLink2Description=https://datasheet.ciiva.com/26339/168275-da-01-en-schottky-barrier-rectif-axial-1n5822-26339005.pdf?src-supplier=Conrad, ComponentLink2URL=https://datasheet.ciiva.com/26339/168275-da-01-en-schottky-barrier-rectif-axial-1n5822-26339005.pdf?src-supplier=Conrad, ComponentLink3Description=https://datasheet.ciiva.com/16303/cd00001626-16303311.pdf?src-supplier=Future+Electronics, ComponentLink3URL=https://datasheet.ciiva.com/16303/cd00001626-16303311.pdf?src-supplier=Future+Electronics, ComponentLink4Description=https://datasheet.ciiva.com/916/cd00001626-916051.pdf?src-supplier=Digi-Key, ComponentLink4URL=https://datasheet.ciiva.com/916/cd00001626-916051.pdf?src-supplier=Digi-Key, ComponentLink5Description=https://datasheet.ciiva.com/916/cd00001626-916050.pdf?src-supplier=Digi-Key, ComponentLink5URL=https://datasheet.ciiva.com/916/cd00001626-916050.pdf?src-supplier=Digi-Key, Current Rating=3A, Element Configuration=Single, Forward Current=3A, Height=5.3mm, Lead Free="Lead Free", Length=9.5mm, Manufacturer Part Number=MMSZ5231B-7-F, Max Reverse Leakage Current=2mA, Max Reverse Voltage (DC)=40V, Max Surge Current=80A, Mount="Through Hole", Number of Pins=2, Output Current=3A, Packaging="Tape and Reel", Peak Non-Repetitive Surge Current=80A, Polarity=Standard, Pricing 1="1=0.47000, 10=0.38600, 50=0.38600, 100=0.26300, 600=0.19700, 1000=0.19700, 1200=0.14700, 2400=0.12700, 9600=0.11900, 10000=0.11900 (USD)", Radiation Hardening=No, REACH SVHC="No SVHC", RoHS=Yes, RoHS Compliant=Yes, Series=-, Stock 1=125419, Supplier 1=Mouser, Voltage Rating (DC)=40V, Weight=0.01lb, Width=5.3mm
"Isolated DC/DC1": "Miniature, 2W Isolated Unregulated DC/DC Converters 12-SOP -40 to 85", Case/Package=SOP, Current - Output 1=400mA, Isolation Voltage=1kV, Manufacturer="Texas Instruments", Max Input Voltage=5.5V, Max Operating Temperature=85°C, Max Output Power=2W, Max Output Voltage=5.25V, Max Power Dissipation=90mW, Min Input Voltage=4.5V, Min Operating Temperature=-40°C, Min Output Voltage=4.75V, Output Voltage=5V, Package Quantity=1000, Quiescent Current=18mA, Supplier Part Number 1=296-41242-1-ND, Switching Frequency=400kHz, Category="Integrated Circuits (ICs)", ComponentLink1Description=https://datasheet.ciiva.com/2035/dcp020503-2035713.pdf?src-supplier=Digi-Key, ComponentLink1URL=https://datasheet.ciiva.com/2035/dcp020503-2035713.pdf?src-supplier=Digi-Key, Efficiency=80%, Features=OTP, Height=0.1inch, Lead Free="Lead Free", Length=0.71inch, Manufacturer Part Number=DCP020505U/1K, Max Output Current=400mA, Number of Outputs=1, Number of Pins=12, Output Current=400mA, Output Power=2W, Output Type=Fixed, Packaging="Tape and Reel", Radiation Hardening=No, RoHS=Yes, RoHS Compliant=Yes, Series=DCP02, Supplier 1=Digi-Key, Voltage - Output 1=5V, Width=0.3inch
J1: "2.0 mm Center Pin, 2.5 A, Right Angle, Through Hole, Dc Power Jack Connector", Package=None, Availability=Unavailable, MP=PJ-037A, Price=None
L1 L2: library part "100 uH inductor"
OPIS1 OPIS2: library part ACSL-6400-50TE, "OPTOISO 2.5KV 4CH OPEN COLL 16SO", Case/Package=SOIC, Forward Current=15mA, Forward Voltage=1.8V, Isolation Voltage=2.5kV, Manufacturer="Broadcom Avago", Max Operating Temperature=100°C, Max Output Current=50mA, Max Power Dissipation=40mW, Min Operating Temperature=-40°C, Output Voltage=7V, Package Quantity=1000, Power Dissipation=65mW, Reverse Breakdown Voltage=5V, Supplier Part Number 1=516-2917-1-ND, Category=Optocouplers, ComponentLink1Description=http://components.arrow.com/part/dataview/41316762S9676761N7786?src-supplier=Arrow+Electronics, ComponentLink1URL=http://components.arrow.com/part/dataview/41316762S9676761N7786?src-supplier=Arrow+Electronics, ComponentLink2Description=http://www.farnell.com/datasheets/1790955.pdf?src-supplier=Farnell, ComponentLink2URL=http://www.farnell.com/datasheets/1790955.pdf?src-supplier=Farnell, ComponentLink3Description=https://www.verical.com/server-webapp/html/getDatasheet?partID=300680&src-supplier=Verical, ComponentLink3URL=https://www.verical.com/server-webapp/html/getDatasheet?partID=300680&src-supplier=Verical, ComponentLink4Description=http://www.avagotech.com/docs/AV02-0235EN?src-supplier=Avnet, ComponentLink4URL=http://www.avagotech.com/docs/AV02-0235EN?src-supplier=Avnet, ComponentLink5Description=http://www.avagotech.com/docs/AV02-0235EN?src-supplier=Digi-Key, ComponentLink5URL=http://www.avagotech.com/docs/AV02-0235EN?src-supplier=Digi-Key, ComponentLink6Description=https://docs.broadcom.com/docs/AV02-0235EN?src-supplier=Digi-Key, ComponentLink6URL=https://docs.broadcom.com/docs/AV02-0235EN?src-supplier=Digi-Key, ComponentLink7Description=http://www.farnell.com/datasheets/1790955.pdf?src-supplier=Newark, ComponentLink7URL=http://www.farnell.com/datasheets/1790955.pdf?src-supplier=Newark, ComponentLink8Description=http://www.farnell.com/datasheets/1790955.pdf?src-supplier=Element14, ComponentLink8URL=http://www.farnell.com/datasheets/1790955.pdf?src-supplier=Element14, ComponentLink9Description=http://www.avagotech.com/search/results.jsp?src=&siteCriteria=ACSL6400&src-supplier=Mouser, ComponentLink9URL=http://www.avagotech.com/search/results.jsp?src=&siteCriteria=ACSL6400&src-supplier=Mouser, Contact Plating=Tin,Matte, Data Rate=15Mbps, Fall Time=12ns, Input Current=15mA, Input Type=DC, Lead Free="Lead Free", Manufacturer Part Number=ACSL-6400-50TE, Mount="Surface Mount", Number of Channels=4, Number of Elements=4, Number of Pins=16, Output Current=50mA, Output Current per Channel=50mA, Packaging="Tape and Reel", Pricing 1="1=10.50000, 10=7.61700, 100=6.29380, 500=5.51204 (USD)", Propagation Delay=100ns, Radiation Hardening=No, REACH SVHC="No SVHC", Rise Time=35ns, RoHS=Yes, RoHS Compliant=Yes, Series=-, Stock 1=12687, Supplier 1=Digi-Key, Supplier 2=Digi-Key, Supplier Part Number 2=311-825CRCT-ND, Turn-On Delay Time=100ns
R1 R2 R3 R4: library part RT0805BRD07402RL, "Res Thin Film 0805 402 Ohm 0.1% 1/8W ±25ppm/°C Molded SMD Paper T/R", Case Code (Imperial)=0805, Case Code (Metric)=2012, Manufacturer=Yageo, Max Operating Temperature=125°C, Min Operating Temperature=-55°C, Power Rating=125mW, Resistance=402R, Supplier Part Number 1=YAG4897CT-ND, Temperature Coefficient=25ppm/°C, Tolerance=0.1%, Voltage Rating=150V, Case/Package=0805, Category="Chip SMD Resistors", ComponentLink1Description=https://datasheet.ciiva.com/12706/pyu-rt-1-to-0-05-rohs-l-4-12706505.pdf?src-supplier=Mouser, ComponentLink1URL=https://datasheet.ciiva.com/12706/pyu-rt-1-to-0-05-rohs-l-4-12706505.pdf?src-supplier=Mouser, Height=500um, Lead Free="Lead Free", Length=2mm, Manufacturer Part Number=RT0805BRD07402RL, Packaging="Tape and Reel", Pricing 1="1=0.38000, 10=0.27200, 100=0.10870, 1000=0.05357, 2500=0.04963 (USD)", RoHS=Yes, RoHS Compliant=Yes, Series=RT, Stock 1=13492, Supplier 1=Digi-Key, Termination=SMD/SMT, Voltage Rating (DC)=150V, Width=1.25mm
R5 R6 R7 R8 R9 R10 R13 R14: library part RC0805FR-071KP, "Res Thick Film 0805 1K Ohm 1% 0.125W(1/8W) ±100ppm/C Pad SMD T/R", Case Code (Imperial)=0805, Case Code (Metric)=2012, Manufacturer=Yageo, Max Operating Temperature=155°C, Max Power Dissipation=125mW, Min Operating Temperature=-55°C, Resistance=1kR, Resistor Type="Thick Film", Supplier Part Number 1=YAG1321CT-ND, Temperature Coefficient=100ppm/°C, Tolerance=1%, Case/Package=0805, Category="Chip SMD Resistors", ComponentLink1Description=http://www.yageo.com/NewPortal/yageodocoutput?fileName=/pdf/R-Chip/PYu-RC_51_RoHS_P_0.pdf&src-supplier=Digi-Key, ComponentLink1URL=http://www.yageo.com/NewPortal/yageodocoutput?fileName=/pdf/R-Chip/PYu-RC_51_RoHS_P_0.pdf&src-supplier=Digi-Key, ComponentLink2Description=http://www.yageo.com.tw/exep/pages/download/literatures/PYu-R_INT-thick_7.pdf?src-supplier=Digi-Key, ComponentLink2URL=http://www.yageo.com.tw/exep/pages/download/literatures/PYu-R_INT-thick_7.pdf?src-supplier=Digi-Key, Features="Moisture Resistant", Height=0.024inch, Length=0.079inch, Manufacturer Part Number=RC0805FR-071KP, Number of Terminations=2, Packaging="Tape and Reel", Pricing 1="1=0.10000, 10=0.06400, 100=0.02600, 1000=0.01168, 2500=0.01014 (USD)", RoHS=Yes, RoHS Compliant=Yes, Stock 1=37560, Supplier 1=Digi-Key, Width=0.049inch
R11 R12 R15: library part RC0805FR-07825RL, "825 Ohms ±1% 0.125W, 1/8W Chip Resistor 0805 (2012 Metric) Moisture Resistant Thick Film", Case Code (Imperial)=0805, Case Code (Metric)=2012, Manufacturer=Yageo, Max Operating Temperature=155°C, Max Power Dissipation=125mW, Min Operating Temperature=-55°C, Resistance=825R, Resistor Type="Thick Film", Supplier Part Number 1=311-825CRCT-ND, Temperature Coefficient=100ppm/°C, Tolerance=1%, Voltage Rating=150V, Case/Package=0805, Category="Chip SMD Resistors", ComponentLink1Description=https://datasheet.ciiva.com/16741/rc0805-16741467.pdf?src-supplier=Future+Electronics, ComponentLink1URL=https://datasheet.ciiva.com/16741/rc0805-16741467.pdf?src-supplier=Future+Electronics, Construction=Rectangular, Contact Plating=Tin,Matte,Lead, Depth=1.25mm, Features="Moisture Resistant", Lead Free="Lead Free", Length=2mm, Manufacturer Part Number=RC0805FR-07825RL, Military Standard=Not, Number of Terminations=2, Packaging="Tape and Reel", Power Rating=125mW, Pricing 1="1=0.10000, 10=0.03700, 100=0.01510, 1000=0.00680, 2500=0.00590 (USD)", Radiation Hardening=No, RoHS=Yes, RoHS Compliant=Yes, Series=RC, Stock 1=643539, Supplier 1=Digi-Key, Technology="THICK FILM", Termination=SMD/SMT, Voltage Rating (DC)=150V, Working Voltage=150V
U1: "Precision Micropower, Low Dropout Voltage Reference, 2.048 V Output, 2.3 to 15 V Supply, Industrial, 8-pin SOIC (R-8), Reel", Manufacturer="Analog Devices", Operating Temp Range="-40 to 85 degC", Code_JEDEC=MS-012-AA, ComponentLink1Description="Manufacturer URL", ComponentLink1URL=http://www.analog.com/en/index.html, ComponentLink2Description=Datasheet, ComponentLink2URL=http://www.analog.com/static/imported-files/data_sheets/REF19xSeries.pdf, ComponentLink3Description="Package Specification", ComponentLink3URL=http://www.analog.com/static/imported-files/packages/PKG_PDF/SOIC_Narrow%20(R)/R_8.pdf, ComponentLink4Description="URL Link1", ComponentLink4URL="Product URL:http://www.analog.com/en/special-linear-functions/voltage-references/ref191/products/product.html", DatasheetVersion="Rev. L", Mounting Technology="Surface Mount", PackageDescription="8-Pin Standard Small Outline Package, Body 4.9 x 3.9 mm, Pitch 1.27 mm", PackageReference=R-8, PackageVersion="060506-A, 06/2006", Packing=Reel, PartNumber=REF191GSZ-REEL, Ref Out TC (ppm/C)=10, Vout=2.048V
Vref_2: library part MAX6037AAUKADJ+T, "IC VREF SERIES ADJ 0.2% SOT23-5", Case/Package=SOT-23-5, Manufacturer=Maxim, Max Input Voltage=5.5V, Max Operating Temperature=125°C, Max Output Current=5mA, Max Output Voltage=5V, Max Supply Current=250uA, Min Operating Temperature=-40°C, Min Output Voltage=1.184V, Package Quantity=1, Supplier Part Number 1=MAX6037AAUKADJ+TCT-ND, Temperature Coefficient=25ppm/°C, Tolerance=0.2%, Category="Voltage References", ComponentLink1Description=https://datasheet.ciiva.com/2008/max6037-max6037c-2008462.pdf?src-supplier=Digi-Key, ComponentLink1URL=https://datasheet.ciiva.com/2008/max6037-max6037c-2008462.pdf?src-supplier=Digi-Key, ComponentLink2Description=https://datasheet.ciiva.com/2008/max6037-max6037c-2008463.pdf?src-supplier=Digi-Key, ComponentLink2URL=https://datasheet.ciiva.com/2008/max6037-max6037c-2008463.pdf?src-supplier=Digi-Key, ComponentLink3Description=https://datasheet.ciiva.com/2008/max6037-max6037c-2008461.pdf?src-supplier=Digi-Key, ComponentLink3URL=https://datasheet.ciiva.com/2008/max6037-max6037c-2008461.pdf?src-supplier=Digi-Key, Lead Free="Lead Free", Manufacturer Part Number=MAX6037AAUKADJ+T, Mount="Surface Mount", Number of Pins=5, Operating Supply Current=250uA, Output Current=5mA, Output Type=Adjustable, Output Voltage=5V, Packaging="Tape and Reel", Radiation Hardening=No, REACH SVHC=Unknown, Reference Type=Series,Adjustable, Reference Voltage=5V, RoHS=Yes, RoHS Compliant=Yes, Series=-, Supplier 1=Digi-Key, Weight=0.001058oz

## Nets (pads, with @x,y where several pads share a name; then routed paths per layer and width w, separated by ;. In a path a pad name is that pad's centre, name@x,y a point inside that pad or via, vN(x,y) a via of type N, cw(c..) or ccw(c..) an arc to the next point about the centre after c; other vN are vias at no path point)
2.048_VDC: C24.2 C25.1 C26.2 C29.2 C32.2 C35.2 C38.2 C41.2 C44.2 C47.2 C50.2 C52.2 C56.2 C58.2 C62.2 C64.2 C68.2 C70.2 LT1.1 LT2.1 LT3.1 LT4.1 LT5.1 LT6.1 LT7.1 LT8.1 LT9.1 LT10.1 LT11.1 LT12.1 LT13.1 LT14.1 LT15.1 LT16.1 U1.6
5VDC: "Isolated DC/DC1.1" C80.1 C81.2 C82.1 C83.2 DC/DC2.4 L2.2
+3V3: C12.2 C13.2 C76.1 C77.2 DC/DC1.4 L1.2 OPIS1.1 OPIS1.3 OPIS1.5 OPIS1.7 OPIS2.10 OPIS2.15 R9.2 R10.2
+5: *1.1 ADC1.10 ADC1.12 ADC1.20 ADC2.10 ADC2.12 ADC2.20 C1.1 C2.1 C3.2 C4.2 C5.2 C6.2 C7.2 C14.1 C16.2 C17.2 C18.1 C19.1 C20.2 C21.2 C22.1 C23.1 C27.2 C30.2 C33.2 C36.2 C39.2 C42.2 C45.2 C48.2 C51.2 C53.2 C57.2 C59.2 C63.2 C65.2 C69.2 C71.2 C84.1 C85.1 C86.2 DIODE3.K LT1.7 LT2.7 LT3.7 LT4.7 LT5.7 LT6.7 LT7.7 LT8.7 LT9.7 LT10.7 LT11.7 LT12.7 LT13.7 LT14.7 LT15.7 LT16.7 OPIS1.10 OPIS1.15 OPIS2.1 OPIS2.7 R5.1 R6.1 R7.1 R8.1 U1.2 U1.3 Vref_2.3 Vref_2.4
+12: C74.2 C75.1 C78.2 C79.1 DC/DC1.2 DC/DC2.2 J1.1
CathH1: OPIS1.2 R4.1
CathH2: OPIS1.4 R3.1
CathH3: OPIS1.6 R2.1
CathH4: OPIS1.8 R1.1
CathL1: OPIS2.2 R11.2
CathL4: OPIS2.8 R12.2
Cell_1_Voltage: ADC1.1 C28.2 R16.2
Cell_2_Voltage: ADC1.2 C31.2 R17.2
Cell_3_Voltage: ADC1.3 C34.2 R18.2
Cell_4_Voltage: ADC1.4 C37.2 R19.2
Cell_5_Voltage: ADC1.5 C40.2 R20.2
Cell_6_Voltage: ADC1.6 C43.2 R21.2
Cell_7_Voltage: ADC1.7 C46.2 R22.2
Cell_8_Voltage: ADC1.8 C49.2 R23.2
Cell_9_Voltage: ADC2.1 C54.2 R24.2
Cell_10_Voltage: ADC2.2 C60.2 R26.2
Cell_11_Voltage: ADC2.3 C66.2 R28.2
Cell_12_Voltage: ADC2.4 C72.2 R30.2
Cell_13_Voltage: ADC2.5 C55.2 R25.2
Cell_14_Voltage: ADC2.6 C61.2 R27.2
Cell_15_Voltage: ADC2.7 C67.2 R29.2
Cell_16_Voltage: ADC2.8 C73.2 R31.2
Chipsel1_HS: ADC1.18 OPIS1.12 R6.2
Chipsel1_LS: R2.2
Chipsel2_HS: ADC2.18 OPIS1.14 R8.2
Chipsel2_LS: R4.2
D_CLK_LS: R1.2
D_In_HS: ADC1.17 ADC2.17 OPIS1.13 R7.2
D_in_LS: R3.2
D_out1_HS: ADC1.15 R11.1
D_out2_HS: ADC2.15 R12.1
D_out_1L: OPIS2.14 R9.1
D_out_2L: OPIS2.11 R10.1
DCLK_HS: ADC1.19 ADC2.19 OPIS1.11 R5.2
GND: "Isolated DC/DC1.2" "Isolated DC/DC1.3" "Isolated DC/DC1.4" ADC1.9 ADC1.13 ADC1.14 ADC2.9 ADC2.13 ADC2.14 C1.2 C2.2 C3.1 C4.1 C5.1 C6.1 C7.1 C12.1 C13.1 C14.2 C15.1 C16.1 C17.1 C18.2 C19.2 C20.1 C21.1 C22.2 C23.2 C24.1 C25.2 C26.1 C27.1 C28.1 C29.1 C30.1 C31.1 C32.1 C33.1 C34.1 C35.1 C36.1 C37.1 C38.1 C39.1 C40.1 C41.1 C42.1 C43.1 C44.1 C45.1 C46.1 C47.1 C48.1 C49.1 C50.1 C51.1 C52.1 C53.1 C54.1 C55.1 C56.1 C57.1 C58.1 C59.1 C60.1 C61.1 C62.1 C63.1 C64.1 C65.1 C66.1 C67.1 C68.1 C69.1 C70.1 C71.1 C72.1 C73.1 C74.1 C75.2 C76.2 C77.1 C78.1 C79.2 C80.2 C81.1 C82.2 C83.1 C84.2 C85.2 C86.1 DC/DC1.3 DC/DC1.5 DC/DC1.6 DC/DC2.3 DC/DC2.5 DC/DC2.6 DIODE1.A DIODE2.A DIODE3.A J1.2 LT1.2 LT1.4 LT2.4 LT3.4 LT4.4 LT5.4 LT6.4 LT7.4 LT8.4 LT9.4 LT10.4 LT11.4 LT12.4 LT13.4 LT14.4 LT15.4 LT16.4 OPIS1.9 OPIS1.16 OPIS2.9 OPIS2.16 R15.1 U1.4 Vref_2.2
Net*1_2: "Isolated DC/DC1.5" *1.2
NetDC/DC1_1: DC/DC1.1 DIODE1.K L1.1
NetDC/DC2_1: DC/DC2.1 DIODE2.K L2.1
NetLT1_3: LT1.3 LT2.2
NetLT1_6: LT1.6 R16.1
NetLT2_3: LT2.3 LT3.2
NetLT2_6: LT2.6 R17.1
NetLT3_3: LT3.3 LT4.2
NetLT3_6: LT3.6 R18.1
NetLT4_3: LT4.3 LT5.2
NetLT4_6: LT4.6 R19.1
NetLT5_3: LT5.3 LT6.2
NetLT5_6: LT5.6 R20.1
NetLT6_3: LT6.3 LT7.2
NetLT6_6: LT6.6 R21.1
NetLT7_3: LT7.3 LT8.2
NetLT7_6: LT7.6 R22.1
NetLT8_3: LT8.3 LT9.2
NetLT8_6: LT8.6 R23.1
NetLT9_3: LT9.3 LT11.2
NetLT9_6: LT9.6 R24.1
NetLT10_2: LT10.2 LT15.3
NetLT10_3: LT10.3 LT12.2
NetLT10_6: LT10.6 R25.1
NetLT11_3: LT11.3 LT13.2
NetLT11_6: LT11.6 R26.1
NetLT12_3: LT12.3 LT14.2
NetLT12_6: LT12.6 R27.1
NetLT13_3: LT13.3 LT15.2
NetLT13_6: LT13.6 R28.1
NetLT14_3: LT14.3 LT16.2
NetLT14_6: LT14.6 R29.1
NetLT15_6: LT15.6 R30.1
NetLT16_3: LT16.3
NetLT16_6: LT16.6 R31.1
NetR13_1: R13.1 R15.2 Vref_2.1
NetR13_2: R13.2 R14.1
V_Ref: ADC1.11 ADC2.11 C15.2 R14.2 Vref_2.5
pads on no net: "Isolated DC/DC1.6" "Isolated DC/DC1.7" "Isolated DC/DC1.8" "Isolated DC/DC1.9" "Isolated DC/DC1.10" "Isolated DC/DC1.11" "Isolated DC/DC1.12" ADC1.16 ADC2.16 LT1.5 LT1.8 LT2.5 LT2.8 LT3.5 LT3.8 LT4.5 LT4.8 LT5.5 LT5.8 LT6.5 LT6.8 LT7.5 LT7.8 LT8.5 LT8.8 LT9.5 LT9.8 LT10.5 LT10.8 LT11.5 LT11.8 LT12.5 LT12.8 LT13.5 LT13.8 LT14.5 LT14.8 LT15.5 LT15.8 LT16.5 LT16.8 OPIS2.3 OPIS2.4 OPIS2.5 OPIS2.6 OPIS2.12 OPIS2.13 U1.1 U1.5 U1.7 U1.8

## Text inside footprints (layer, text, board x,y; h text height)
"Isolated DC/DC1": Top Overlay "DCP020505U" at 6365,2146.14 h60 r270